# Altium PCB FUTSW.PcbDoc
Units mm, origin at the board's own origin, x right, y up, seen from the top; angles counter-clockwise.
Board outline 162 x 30 mm, 2 copper layers (Top Layer, Bottom Layer); 131 components, 84 nets, 390 pads, 90 vias.
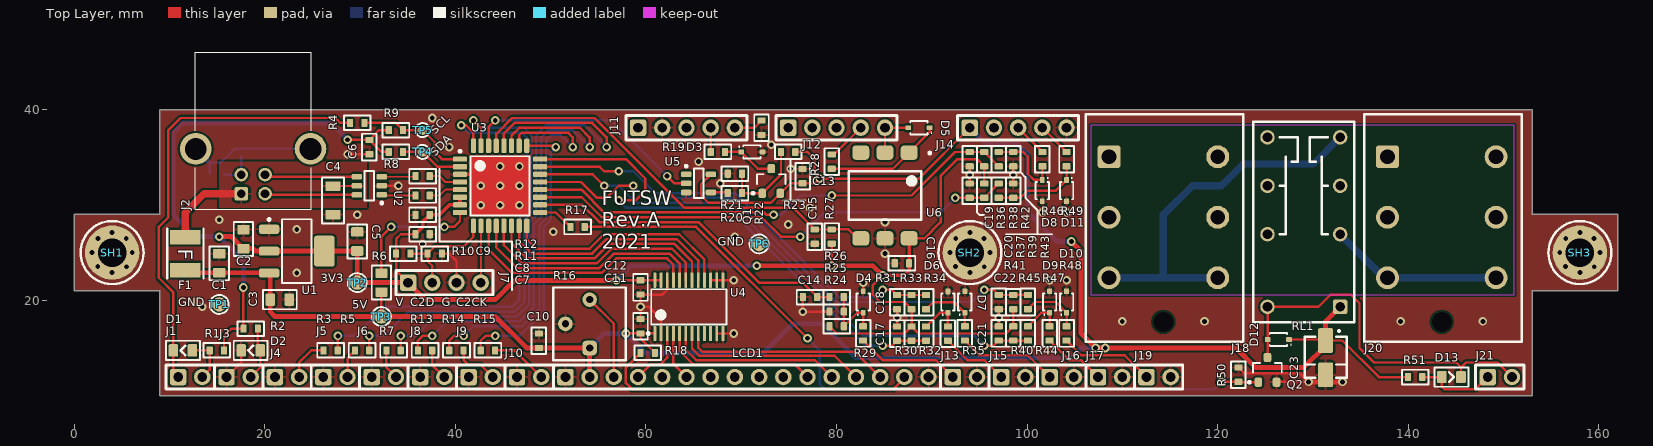
[diagram p0: Top Layer view]
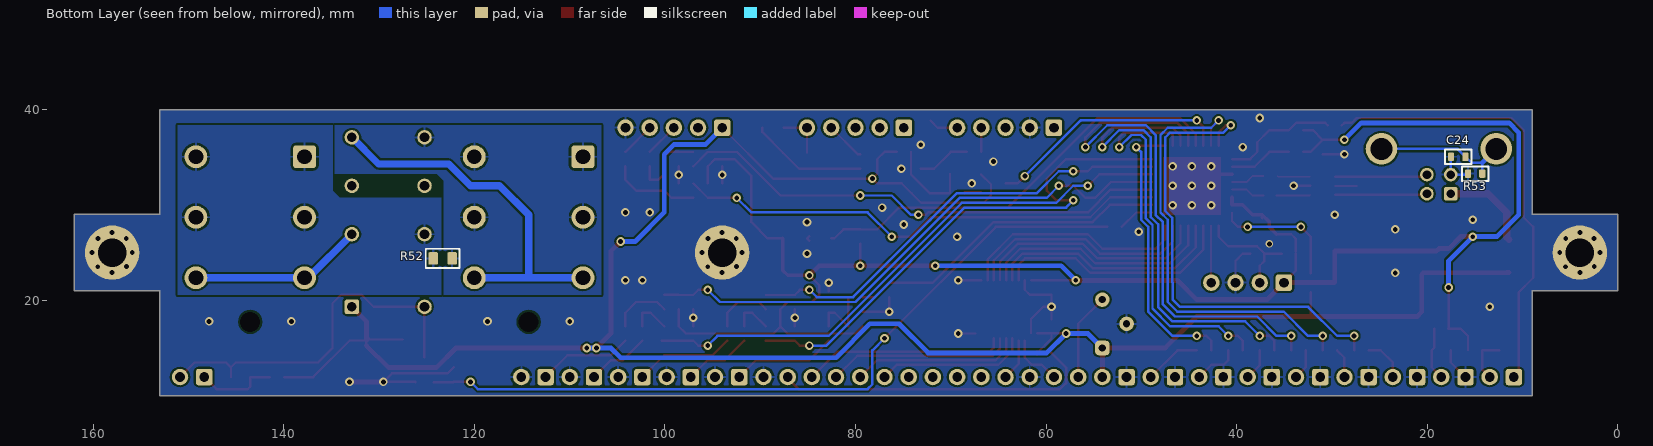
[diagram p1: Bottom Layer view, seen from below]
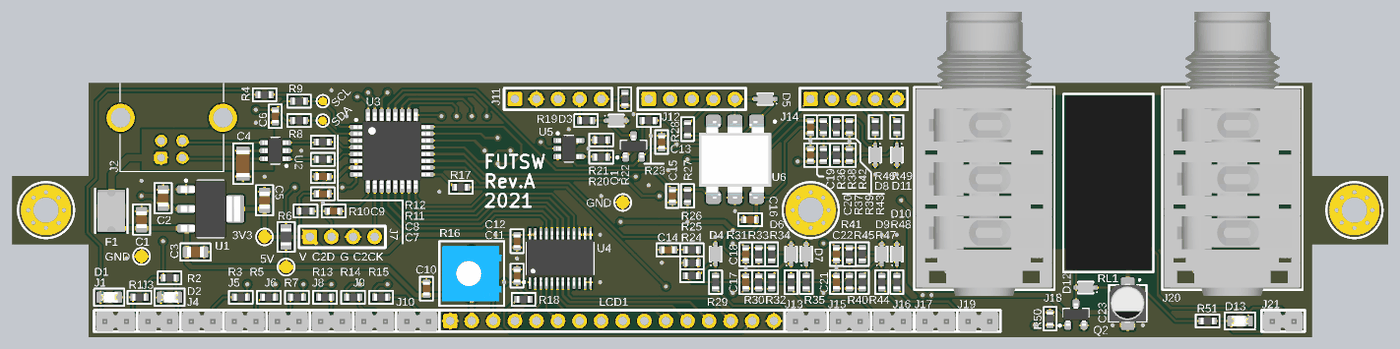
[diagram p2: 3D render of the assembled board from above, using the file's embedded part models]
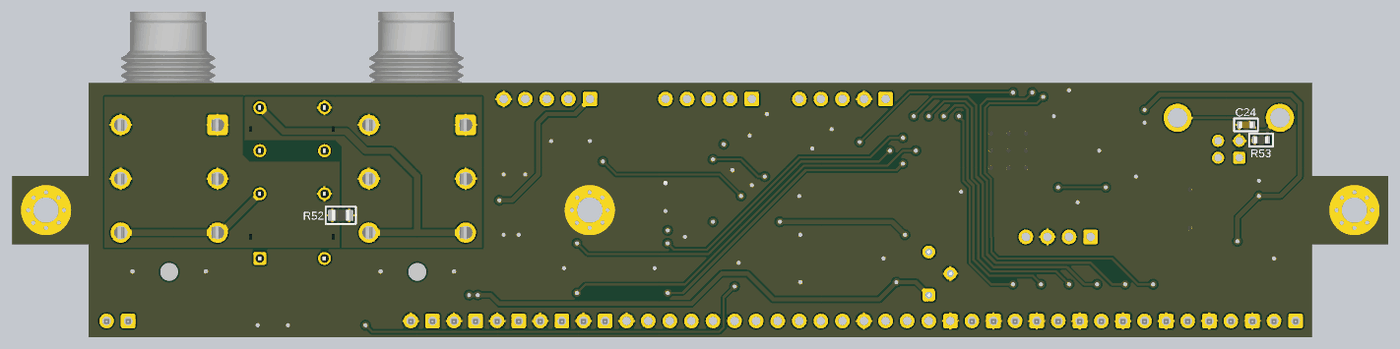
[diagram p3: 3D render of the assembled board from below, using the file's embedded part models]

## Layer stack, top to bottom
Top Solder: solder mask 0.0102, Solder Resist, Dk 3.5
Top Layer: signal copper 0.0356
Dielectric 1: dielectric 0.32, FR-4, Dk 4.8
Bottom Layer: signal copper 0.0356
Bottom Solder: solder mask 0.0102, Solder Resist, Dk 3.5

## Board outline
0,29 9,29 9,40 153,40 153,29 162,29 162,21 153,21 153,10 9,10 9,21 0,21

## Design rules (kind name [scope] priority, off if disabled: settings)
Clearance [All] p1: gap=0.203 ignorepadtopadclearanceinfootprint=FALSE
DiffPairsRouting [All] p1: maxlimit=0.254 minlimit=0.203 mostfreqgap=0.254 toplayer_minwidth=0.203 toplayer_maxwidth=0.254 toplayer_prefwidth=0.254 bottomlayer_minwidth=0.203 bottomlayer_maxwidth=0.254 bottomlayer_prefwidth=0.254 maxuncoupledlength=12.7
HoleSize [All] p1: absolutevalues=TRUE maxlimit=2.54 minlimit=0.3 maxpercent=80.000 minpercent=20.000
PolygonConnect PolygonConnectToComponentPrimitives [All vs IsComponentPrimitive and not HasFootprint('SH\D3.0\S5.7')] p1: connectstyle=Relief reliefconductorwidth=0.254 reliefentries=4 polygonreliefangle="90 Angle" airgapwidth=0.254
PolygonConnect [All] p2: connectstyle=Direct reliefconductorwidth=0.254 reliefentries=4 polygonreliefangle="90 Angle" airgapwidth=0.254
RoutingVias [All] p1: holewidth=0.3 width=0.8 viastyle="Through Hole" minholewidth=0.3 minwidth=0.6 maxholewidth=0.3 maxwidth=1.5 // PCBWay Capabilities
SolderMaskExpansion [All] p1: expansion=0.102
Width [All] p1: maxlimit=0.762 minlimit=0.203 preferedwidth=0.254
28 further rules are at their usual default settings.

## Classes and differential pairs
component class Inputs: C4 C7 C14 C21 C22 C23 C24 D4 D7 D8 D9 D10 D11 D12 D13 J5 J6 J7 J8 J9 J10 J13 J14 J15 J16 J17 J18 J19 J21 Q2 R3 R5 R7 R9 R10 R11 R13 R14 R15 R17 R21 R26 R30 R31 R33 R36 R38 R39 R40 R41 R43 R44 R46 R47 R48 R49 R50 R52 R53 RL1
component class LCD: C3 C11 C22 LCD1 R30 R53 U4
component class MCU: C3 C4 C5 C6 C7 C14 C17 C18 C19 C20 C21 C23 C24 D12 D13 F1 J7 J13 J14 J16 J20 J21 R2 R10 R11 R17 R21 R30 R31 R39 R42 R43 R46 R49 R51 R53 SH1 SH2 SH3 TP1 TP2 TP3 TP4 TP5 TP6 U1 U2 U3
component class MIDI: C16 C21 C23 D4 D11 J5 J14 Q2 R34 R38 R44 R46 R47 R52 R53 U5
differential pair USBD: +USBD_P -USBD_N
differential pair USBUP1: +USBUP1_P -USBUP1_N
differential pair USBUP2: +USBUP2_P -USBUP2_N

## Components (designator, comment, footprint, x,y, rotation, side; value= is the part's Value field where it differs from the comment)
C1 "100nF" 0805C_RF_M 15.24,23.876 r270 top (schematic designator C13)
C2 "100nF" 0805C_RF_M 17.78,26.416 r270 top (schematic designator C15)
C3 "1nF" 0805C_RF_M 21.59,20.066 r180 top (schematic designator C12)
C4 "100nF" 1206C_RF_M 27.178,30.48 r270 top (schematic designator C5)
C5 "1nF" 0805C_RF_M 29.718,26.162 r270 top (schematic designator C14)
C6 "100nF" 0603C_RF_M 30.988,36.068 r90 top (schematic designator C4)
C7 "100nF" 0603C_RF_M 36.576,26.924 r180 top (schematic designator C19)
C8 "1uF" 0603C_RF_M 36.576,28.956 r0 top (schematic designator C18)
C9 "100nF" 0603C_RF_M 37.846,24.892 r180 top (schematic designator C20)
C10 "100nF" 0603C_RF_M 48.768,15.748 r270 top (schematic designator C28)
C11 "100nF" 0603C_RF_M 59.436,17.272 r270 top (schematic designator C29)
C12 "100nF" 0603C_RF_M 59.436,21.336 r90 top (schematic designator C30)
C13 "100nF" 0603C_RF_M 76.454,33.02 r270 top (schematic designator C25)
C14 "100nF" 0603C_RF_M 77.228,20.32 r0 top (schematic designator C8)
C15 "100nF" 0603C_RF_M 77.724,26.67 r270 top (schematic designator C27)
C16 "100nF" 0603C_RF_M 86.868,23.876 r0 top (schematic designator C26)
C17 "100nF" 0603C_RF_M 86.36,16.498 r270 top (schematic designator C6)
C18 "100nF" 0603C_RF_M 86.36,19.8 r90 top (schematic designator C7)
C19 "100nF" 0603C_RF_M 93.98,31.496 r90 top (schematic designator C3)
C20 "100nF" 0603C_RF_M 93.98,34.798 r90 top (schematic designator C1)
C21 "100nF" 0603C_RF_M 97.028,16.51 r270 top (schematic designator C9)
C22 "100nF" 0603C_RF_M 97.028,19.812 r90 top (schematic designator C10)
C23 "4.7 uF" C_EL_B_4MM_RF_M 131.318,13.97 r270 top (schematic designator C2)
C24 "1nF" 0603C_RF_M 16.764,35.052 r180 bottom (schematic designator C17)
D1 "LED" 0805LED_RF_M 11.43,14.732 r0 top (schematic designator D17)
D2 "LED" 0805LED_RF_M 18.542,14.732 r0 top (schematic designator D16)
D3 "TVS" NXP_SOD-323_RF_M 71.12,35.56 r0 top (schematic designator D19)
D4 "TVS" NXP_SOD-323_RF_M 82.804,19.812 r90 top (schematic designator D7)
D5 "D" NXP_SOD-323_RF_M 88.646,38.1 r180 top (schematic designator D18)
D6 "TVS" NXP_SOD-323_RF_M 91.694,19.8 r90 top (schematic designator D5)
D7 "TVS" NXP_SOD-323_RF_M 93.472,19.812 r90 top (schematic designator D6)
D8 "TVS" NXP_SOD-323_RF_M 101.6,31.496 r270 top (schematic designator D4)
D9 "TVS" NXP_SOD-323_RF_M 102.362,19.812 r90 top (schematic designator D8)
D10 "TVS" NXP_SOD-323_RF_M 104.14,19.812 r90 top (schematic designator D9)
D11 "TVS" NXP_SOD-323_RF_M 104.14,31.496 r270 top (schematic designator D3)
D12 "D" NXP_SOD-323_RF_M 126.365,15.875 r180 top (schematic designator D1)
D13 "LED" 0805LED_RF_M 144.526,11.938 r180 top (schematic designator D2)
F1 "250 mA" BOURNS_MF-MSMF110/16-2_RF_H 11.684,24.892 r270 top
J1 "LED" HEADER-2.54-2P1 10.922,11.938 r0 top (schematic designator J17)
J2 "USB" UJ2-BH-2-TH 18.796,33.528 r180 top (schematic designator J18)
J3 "PINHDR_2x1" HEADER-2.54-2P1 16.002,11.938 r0 top (schematic designator J19)
J4 "LED1" HEADER-2.54-2P1 21.082,11.938 r0 top (schematic designator J11)
J5 "LED2" HEADER-2.54-2P1 26.162,11.938 r0 top (schematic designator J12)
J6 "LED3" HEADER-2.54-2P1 31.242,11.938 r0 top (schematic designator J13)
J7 "DEBUG" HEADER-2.54-4P1 35.052,21.844 r0 top (schematic designator J20)
J8 "LED4" HEADER-2.54-2P1 36.322,11.938 r0 top (schematic designator J14)
J9 "LED5" HEADER-2.54-2P1 41.402,11.938 r0 top (schematic designator J15)
J10 "LED6" HEADER-2.54-2P1 46.482,11.938 r0 top (schematic designator J16)
J11 "PINHDR-5P1" HEADER-2.54-5P1 59.182,38.1 r0 top (schematic designator J26)
J12 "PINHDR-5P1" HEADER-2.54-5P1 74.93,38.1 r0 top (schematic designator J27)
J13 "Pedal" HEADER-2.54-2P1 92.202,11.938 r0 top (schematic designator J8)
J14 "PINHDR_5x1" HEADER-2.54-5P1 93.98,38.1 r0 top (schematic designator J2)
J15 "Switch" HEADER-2.54-2P1 97.282,11.938 r0 top (schematic designator J6)
J16 "Switch" HEADER-2.54-2P1 102.362,11.938 r0 top (schematic designator J7)
J17 "Switch" HEADER-2.54-2P1 107.442,11.938 r0 top (schematic designator J9)
J18 "ACJS-HHDR" ACJS-HHDR 114.3,28.702 r270 top (schematic designator J4)
J19 "Switch" HEADER-2.54-2P1 112.522,11.938 r0 top (schematic designator J10)
J20 "ACJS-HHDR" ACJS-HHDR 143.51,28.702 r270 top (schematic designator J1)
J21 "LED" HEADER-2.54-2P1 148.336,11.938 r0 top (schematic designator J3)
LCD1 "WH1602N" PINHDR-16P1-2.54 51.562,11.938 r0 top
Q1 "PNP" SOT-23-3 73.152,32.512 r90 top (schematic designator Q2)
Q2 "IRLML2502" IRLML_SOT-23 125.222,12.7 r90 top (schematic designator Q1)
R1 "470R" 0603R_RF_M 14.986,14.732 r0 top (schematic designator R16)
R2 "560R" 0603R_RF_M 18.542,17.018 r180 top (schematic designator R42)
R3 "470R" 0603R_RF_M 26.924,14.732 r0 top (schematic designator R36)
R4 "0R" 0603R_RF_M 29.718,38.608 r180 top (schematic designator R31)
R5 "470R" 0603R_RF_M 30.226,14.732 r0 top (schematic designator R37)
R6 "1K" 0805R_RF_M 32.258,21.844 r270 top (schematic designator R28)
R7 "470R" 0603R_RF_M 33.528,14.732 r0 top (schematic designator R38)
R8 "10K" 0603R_RF_M 33.782,35.56 r180 top (schematic designator R30)
R9 "10K" 0603R_RF_M 33.782,37.846 r180 top (schematic designator R29)
R10 "10K" 0603R_RF_M 34.544,24.892 r0 top (schematic designator R51)
R11 "22R" 0603R_RF_M 36.576,30.988 r180 top (schematic designator R43)
R12 "22R" 0603R_RF_M 36.576,33.02 r180 top (schematic designator R44)
R13 "470R" 0603R_RF_M 36.83,14.732 r180 top (schematic designator R39)
R14 "470R" 0603R_RF_M 40.132,14.732 r180 top (schematic designator R40)
R15 "470R" 0603R_RF_M 43.434,14.732 r180 top (schematic designator R41)
R16 "20K" BOURNS_3362P 54.102,17.526 r90 top (schematic designator R60)
R17 "330R" 0603R_RF_M 52.832,27.686 r0 top (schematic designator R12)
R18 "0R" 0603R_RF_M 60.198,14.478 r180 top (schematic designator R62)
R19 "220R" 0603R_RF_M 67.564,35.56 r180 top (schematic designator R57)
R20 "1K" 0603R_RF_M 69.342,31.242 r180 top (schematic designator R54)
R21 "10K" 0603R_RF_M 69.342,33.274 r180 top (schematic designator R17)
R22 "220R" 0603R_RF_M 72.136,38.1 r90 top (schematic designator R59)
R23 "10K" 0603R_RF_M 74.93,35.56 r0 top (schematic designator R18)
R24 "10K" 0603R_RF_M 80.022,17.272 r180 top (schematic designator R20)
R25 "10K" 0603R_RF_M 80.022,18.796 r0 top (schematic designator R27)
R26 "1K" 0603R_RF_M 80.022,20.32 r180 top
R27 "10K" 0603R_RF_M 79.502,26.682 r90 top (schematic designator R58)
R28 "220R" 0603R_RF_M 79.502,34.544 r270 top (schematic designator R55)
R29 "1K" 0603R_RF_M 82.804,16.51 r90 top (schematic designator R25)
R30 "5K1" 0603R_RF_M 87.884,16.498 r270 top (schematic designator R5)
R31 "5K1" 0603R_RF_M 87.884,19.8 r90 top (schematic designator R10)
R32 "1K" 0603R_RF_M 89.408,16.498 r270 top (schematic designator R22)
R33 "1K" 0603R_RF_M 89.408,19.8 r90 top (schematic designator R24)
R34 "1K" 0603R_RF_M 91.694,16.498 r90 top (schematic designator R21)
R35 "1K" 0603R_RF_M 93.472,16.51 r90 top (schematic designator R23)
R36 "10K" 0603R_RF_M 95.504,31.496 r90 top (schematic designator R4)
R37 "10K" 0603R_RF_M 95.504,34.798 r270 top (schematic designator R1)
R38 "1K" 0603R_RF_M 97.028,31.496 r90 top (schematic designator R9)
R39 "1K" 0603R_RF_M 97.028,34.798 r270 top (schematic designator R7)
R40 "5K1" 0603R_RF_M 98.552,16.51 r270 top (schematic designator R13)
R41 "5K1" 0603R_RF_M 98.552,19.8 r90 top (schematic designator R15)
R42 "2K" 0603R_RF_M 98.552,31.496 r90 top (schematic designator R11)
R43 "2K" 0603R_RF_M 98.552,34.798 r90 top (schematic designator R3)
R44 "1K" 0603R_RF_M 100.076,16.51 r270 top (schematic designator R33)
R45 "1K" 0603R_RF_M 100.076,19.812 r90 top (schematic designator R35)
R46 "1K" 0603R_RF_M 101.6,34.798 r270 top (schematic designator R6)
R47 "1K" 0603R_RF_M 102.362,16.51 r90 top (schematic designator R32)
R48 "1K" 0603R_RF_M 104.14,16.51 r90 top (schematic designator R34)
R49 "1K" 0603R_RF_M 104.14,34.798 r270 top (schematic designator R8)
R50 "33K" 0603R_RF_M 122.174,12.192 r90 top (schematic designator R14)
R51 "1K" 0603R_RF_M 140.716,11.938 r180 top (schematic designator R2)
R52 "0R" 0805R_RF_M 123.317,24.384 r0 bottom (schematic designator R19)
R53 "1M" 0603R_RF_M 14.986,33.274 r180 bottom (schematic designator R45)
RL1 "G5V-2-H1" G5V-2-H1 129.032,28.194 r90 top
SH1 "SH-30/57" SH\D3.0\S5.7 4,25 r0 top locked
SH2 "SH-30/57" SH\D3.0\S5.7 94,25 r0 top locked (schematic designator SH3)
SH3 "SH-30/57" SH\D3.0\S5.7 158,25 r0 top locked (schematic designator SH2)
TP1 "GND" PAD_R_1.5MM 15.24,19.558 r0 top (schematic designator TP3)
TP2 "3V3" PAD_R_1.5MM 29.718,21.844 r90 top (schematic designator TP5)
TP3 "5V" PAD_R_1.5MM 32.258,18.288 r90 top (schematic designator TP4)
TP4 "SDA" PAD_R_1MM 36.576,35.56 r90 top (schematic designator TP2)
TP5 "SCL" PAD_R_1MM 36.576,37.846 r0 top (schematic designator TP1)
TP6 "GND" PAD_R_1.5MM 71.882,25.908 r0 top
U1 "LM1117IMP-3.3" SOT-223 23.368,25.146 r0 top (schematic designator U2)
U2 "USBLC6-2SC6" TI_SOT-23-6 30.988,32.004 r180 top (schematic designator U1)
U3 "C8051F320" LQFP-32 44.704,32.004 r0 top
U4 "SN74LVC4245APWR" TI_TSSOP-24 64.516,19.304 r90 top (schematic designator U8)
U5 "SN74LVC1G17DBVR" TI_SOT-23-5 65.532,32.258 r0 top (schematic designator U6)
U6 "H11L1SR2M" H11L1SR2M_SMD-6 85.09,30.988 r180 top (schematic designator U7)

## Footprints (in the part's own frame and the unit in brackets; to place one, negate y for a bottom-side part, rotate by r counter-clockwise, add the part's x,y. Pads: shape width x height; smd on the part's side, far side on the other; paste and mask are expansions set on the pad)
0603C_RF_M [mm] "Chip Capacitor 0603 Reflow Medium"
  rrect25% 0.65x0.85 smd: 1(-0.75,0) 2(0.75,0)
  silkscreen extent -1.4,-0.76 1.4,0.76, body extent -0.8,-0.4 0.8,0.41, height 0.9
0603R_RF_M [mm] "Chip Resistor 0603 Reflow Medium"
  rrect25% 0.65x0.85 smd: 1(-0.75,0) 2(0.75,0)
  silkscreen extent -1.4,-0.76 1.4,0.76, body extent -0.8,-0.4 0.8,0.4, height 0.55
0805C_RF_M [mm] "Chip Capacitor 0805 Reflow Medium"
  rrect25% 1x1.3 smd: 1(-1,0) 2(1,0)
  silkscreen extent -1.78,-1.02 1.78,1.02, body extent -1,-0.62 1.01,0.63, height 0.94
0805LED_RF_M [mm] "Chip LED 0805 Reflow Medium"
  rrect25% 1x1.3 smd: A(1,0) C(-1,0)
  silkscreen extent -1.78,-1.02 1.78,1.02, body extent -1,-0.62 1,0.63, height 0.7
0805R_RF_M [mm] "Chip Resistor 0805 Reflow Medium"
  rrect25% 1x1.3 smd: 1(-1,0) 2(1,0)
  silkscreen extent -1.78,-1.02 1.78,1.02, body extent -1,-0.62 1,0.63, height 0.6
1206C_RF_M [mm] "Chip Capacitor 1206 Reflow Medium"
  rrect25% 1x1.6 smd: 1(-1.5,0) 2(1.5,0)
  silkscreen extent -2.41,-1.14 2.41,1.14, body extent -1.6,-0.8 1.6,0.8, height 0.94
ACJS-HHDR [mm] "1/4\" Stereo Jack PCB Receptacle"
  rrect25% 2.4x2.4 hole 1.55: 1(-6.35,-5.7)
  round 2.4 hole 1.55: 2(0,-5.7) 3(6.35,-5.7) 4(-6.35,5.7) 5(0,5.7) 6(6.35,5.7)
  round 1.524 hole 2.1 unplated: ""(10.98,0)
  silkscreen extent -10.8,-8.13 13.08,8.38, body extent -19.67,-7.87 13.83,8.13, height 12.8
BOURNS_3362P [mil] "Potentiometer Top Adjust"
  rrect50% 60x60 hole 30: 1(-100,0)
  round 60 hole 30: 2(0,100) 3(100,0)
  silkscreen extent -150,-150 150,150, body extent -130,-138 130,138, height 192
BOURNS_MF-MSMF110/16-2_RF_H [mil] "PTC RESET FUSE SMD 1812"
  rect 60x126 smd: 1(-68,0) 2(68,0)
  silkscreen extent -103,-75 102,75, body extent -88,-64 92,64, height 26
C_EL_B_4MM_RF_M [mm] "Electrolytic Capacitor SMD Size B 4mm OD"
  rrect25% 2.6x1.6 smd: N(1.8,0) P(-1.8,0)
  silkscreen extent -2.88,-2.2 2.1,2.2, body extent -2.35,-2.17 2.25,2.13, height 3.91
G5V-2-H1 [mil] "OMRON Low Signal Relay DPDT [ Compatible with HJR1-2C ]"
  rrect30% 60x60 hole 40: 1(-350,-150)
  round 60 hole 40: 4(-50,-150) 6(150,-150) 8(350,-150) 9(350,150) 11(150,150) 13(-50,150) 16(-350,150)
  silkscreen extent -413,-209 414,208, body extent -403,-200 404,198, height 433
H11L1SR2M_SMD-6 [mm] "SMD-6 OPTOISO"
  rrect50% 1.78x1.52 smd: 1(-2.54,-4.505) 2(0,-4.505) 3(2.54,-4.505) 4(2.54,4.505) 5(0,4.505) 6(-2.54,4.505)
  silkscreen extent -4.82,-4.57 3.81,2.54, body extent -4.25,-4.52 4.26,4.64, height 5.06
HEADER-2.54-2P1 [mil] "Pin Header Single Row 2 Positions Pitch 2.54 mm"
  rrect30% 68x68 hole 40: 1(0,0)
  round 68 hole 40: 2(100,0)
  silkscreen extent -50,-50 150,50, body extent -42,-50 142,45, height 331
HEADER-2.54-4P1 [mil] "Pin Header Single Row 4 Positions Pitch 2.54 mm"
  rrect30% 68x68 hole 40: 1(0,0)
  round 68 hole 40: 2(100,0) 3(200,0) 4(300,0)
  silkscreen extent -50,-50 350,50
HEADER-2.54-5P1 [mil] "Pin Header Single Row 5 Positions Pitch 2.54 mm"
  rrect30% 68x68 hole 40: 1(0,0)
  round 68 hole 40: 2(100,0) 3(200,0) 4(300,0) 5(400,0)
  silkscreen extent -50,-50 450,50
IRLML_SOT-23 [mm] "Infineon's IRLML Series Logic-Level Transistor SOT-23"
  rrect50% 0.97x0.8 smd: 1(-1.3,0.95) 2(-1.3,-0.95) 3(1.3,0)
  silkscreen extent -1.42,-1.5 0.7,2.02, body extent -1.32,-1.52 1.32,1.52, height 1.12
LQFP-32 [mm]
  rrect50% 1.5x0.55 smd: 1(-4.2,2.8) 2(-4.2,2) 3(-4.2,1.2) 4(-4.2,0.4) 5(-4.2,-0.4) 6(-4.2,-1.2) 7(-4.2,-2) 8(-4.2,-2.8) 17(4.2,-2.8) 18(4.2,-2) 19(4.2,-1.2) 20(4.2,-0.4) 21(4.2,0.4) 22(4.2,1.2) 23(4.2,2) 24(4.2,2.8)
  rrect50% 0.55x1.5 smd: 9(-2.8,-4.2) 10(-2,-4.2) 11(-1.2,-4.2) 12(-0.4,-4.2) 13(0.4,-4.2) 14(1.2,-4.2) 15(2,-4.2) 16(2.8,-4.2) 25(2.8,4.2) 26(2,4.2) 27(1.2,4.2) 28(0.4,4.2) 29(-0.4,4.2) 30(-1.2,4.2) 31(-2,4.2) 32(-2.8,4.2)
  silkscreen extent -4.32,-3.1 3.1,3.75, body extent -4.5,-4.5 4.5,4.5, height 1.2
NXP_SOD-323_RF_M [mm] "SOD-232 NXP PESD5V0S1BA Reflow"
  rrect25% 0.6x0.5 smd: A(1.125,0) C(-1.125,0)
  silkscreen extent -1.37,-0.7 0.9,0.7, body extent -1.27,-0.65 1.27,0.65, height 0.99
PAD_R_1.5MM [mm] "Pad Rounded 1.5mm"
  round 1.5 smd paste-10: 1(0,0)
  silkscreen extent -0.99,-0.99 0.99,0.99
PAD_R_1MM [mm] "Pad Rounded 1mm"
  round 1 smd paste-10: 1(0,0)
  silkscreen extent -0.74,-0.74 0.74,0.73
PINHDR-16P1-2.54 [mil] "Pin Header Single Row 16 Positions Pitch 2.54 mm"
  rrect30% 68x68 hole 40: 1(0,0)
  round 68 hole 40: 2(100,0) 3(200,0) 4(300,0) 5(400,0) 6(500,0) 7(600,0) 8(700,0) 9(800,0) 10(900,0) 11(1000,0) 12(1100,0) 13(1200,0) 14(1300,0) 15(1400,0) 16(1500,0)
  silkscreen extent -50,-50 1550,50
SH\D3.0\S5.7 [mm] "Screw Hole D3.0/5.7 T/B"
  round 0.7 hole 0.5: 1(-2.1,0) 1(-1.499,-1.473) 1(-1.473,1.473) 1(0,-2.1) 1(0,2.1) 1(1.473,1.473) 1(1.499,-1.499) 1(2.1,0)
  round 5.7 hole 3: 1(0,0)
  silkscreen extent -3.3,-3.3 3.3,3.3
SOT-23-3 [mm]
  rrect50% 0.97x0.8 smd: 1(-1.3,0.95) 2(-1.3,-0.95) 3(1.3,0)
  silkscreen extent -1.42,-1.5 0.7,2.02, body extent -1.32,-1.52 1.32,1.52, height 1.12
SOT-223 [mm] "SOT-223: 4 Leads; Tab Not Connected"
  rrect50% 2.15x0.95 smd: 1(-2.9,2.3) 2(-2.9,0) 3(-2.9,-2.3)
  rrect25% 2.15x3.25 smd: 4(2.9,0)
  silkscreen extent -3.02,-3.35 1.55,3.45, body extent -3.5,-3.35 3.5,3.35, height 1.8
TI_SOT-23-5 [mm]
  rrect50% 1.1x0.6 smd: 1(-1.3,0.95) 2(-1.3,0) 3(-1.3,-0.95) 4(1.3,-0.95) 5(1.3,0.95)
  silkscreen extent -1.42,-1.55 0.5,1.92, body extent -1.5,-1.53 1.5,1.53, height 1.45
TI_SOT-23-6 [mm]
  rrect50% 1.1x0.6 smd: 1(-1.3,0.95) 2(-1.3,0) 3(-1.3,-0.95) 4(1.3,-0.95) 5(1.3,0) 6(1.3,0.95)
  silkscreen extent -1.43,-1.55 0.5,1.92, body extent -1.5,-1.52 1.5,1.53, height 1.45
TI_TSSOP-24 [mm]
  rrect50% 1.6x0.3 smd: 1(-2.8,3.575) 2(-2.8,2.925) 3(-2.8,2.275) 4(-2.8,1.625) 5(-2.8,0.975) 6(-2.8,0.325) 7(-2.8,-0.325) 8(-2.8,-0.975) 9(-2.8,-1.625) 10(-2.8,-2.275) 11(-2.8,-2.925) 12(-2.8,-3.575) 13(2.8,-3.575) 14(2.8,-2.925) 15(2.8,-2.275) 16(2.8,-1.625) 17(2.8,-0.975) 18(2.8,-0.325) 19(2.8,0.325) 20(2.8,0.975) 21(2.8,1.625) 22(2.8,2.275) 23(2.8,2.925) 24(2.8,3.575)
  silkscreen extent -2.92,-3.95 1.85,4.4, body extent -3.2,-3.95 3.2,3.95, height 1.2
UJ2-BH-2-TH [mm] "USB 2.0 Type B Receptacle (CUI UJ2-BH-2-TH)"
  rrect30% 1.428x1.428 hole 0.92: 1(1.25,2.355)
  round 1.428 hole 0.92: 2(-1.25,2.355) 3(-1.25,0.355) 4(1.25,0.355)
  round 3.316 hole 2.3: SH(-6.02,-2.355) SH(6.02,-2.355)
  silkscreen extent -6.1,-12.51 6.1,3.99, body extent -7.52,-12.47 7.48,3.98, height 11.1

## Part data
C1 C2 C3 C4 C5 C6 C7 C8 C9 C10 C11 C12 C13 C14 C15 C16 C17 C18 C19 C20 C21 C22 C24: library part C, "Capacitor", Manufacturer="Generic Brand", Max Voltage="? V", Tolerance=?, Category=Capacitor, Mounting Technology=SMT, Supplier Link=http://
C23: library part C-P, "Polarized Capacitor", Manufacturer="Generic Brand", Max Voltage="? V", Tolerance=?, Category=Capacitor, Mounting Technology=SMT, Supplier Link=http://
D1 D2 D13: Emitting Color=Unspecified, Forward Voltage Drop="? V", Manufacturer="Generic Brand", Category=Diode, Mounting Technology=SMT, Supplier Link=http://
D3 D4 D6 D7 D8 D9 D10 D11: library part D-TVS, "TVS Diode Bidirectional", Manufacturer="Generic Brand", Power Rating="? W", Category=Diode, Mounting Technology=SMT, Supplier Link=http://
D5 D12: "Diode (Rectifier)", Manufacturer="Generic Brand", Max Forward Voltage="? V", Power Rating="? W", Category=Diode, Mounting Technology=SMT, Supplier Link=http://
F1: library part PPTC, "Resettable Fuse", Manufacturer="Generic Brand", Max Voltage="? V", Category=Fuse, Hold Current="250 mA", Mounting Technology=SMT, Supplier Link=http://
J1 J4 J5 J6 J8 J9 J10 J15 J16 J17 J19 J21: library part PINHDR_2x1, "Generic Pin Header 2x1"
J2: library part USBB-1J, "USB Type B Receptacle", Case="USB Type B", Manufacturer=Connfly, Supplier Part No=249636968, Mounting Type=THT, Product Number="USBB-1J (DS1099-WN0)", Supplier=Chipdip, Supplier Link=https://www.chipdip.by/product/usbb-1j
J3: "Generic Pin Header 2x1"
J7: library part PINHDR_4x1, "Generic Pin Header 4x1"
J11 J12 J14: "Generic Pin Header 5x1"
J13: library part PINHDR-2P1, "Pin Header Single Row 2 Positions", Mounting Technology=THT
J18 J20: "1/4\" Stereo Jack PCB Receptacle", Alternative Supplier Part No=44079, Manufacturer=Amphenol, Manufacturer Product No=ACJM-HHDR, Alternative Supplier=Belchip, Alternative Supplier Link=https://belchip.by/product/?selected_product=44079, Mounting Technology=HMT
LCD1: "Dot Matrix Character LCD Module 16x2", Manufacturer=Winstar, Manufacturer Part No=WH1602B-YYH-CTK, Supplier Part No=9000032691, Mounting Technology=THT, Supplier=Chipdip, Supplier Link=https://www.chipdip.by/product/wh1602b-yyh-ctk
Q1: "Bipolar Transistor PNP", Manufacturer="Generic Brand", Power Rating="? W", Category=Transistor, IGS="? A", Mounting Technology=SMT, Supplier Link=http://, VDS="? V", VGS="? V"
Q2: "MOSFET N-CH 20V 4.2A SOT23", Alternative Supplier Part No=517112745, Manufacturer=Infineon, Manufacturer Part No=IRLML2502TRPBF, Package=SOT-23, Supplier Part No=IRLML2502TRPBFCT-ND, Alternative Supplier=Chipdip, Alternative Supplier Link=https://www.chipdip.by/product/irlml2502tr, Mounting Technology=SMT, Supplier=DigiKey, Supplier Link=https://www.digikey.com/en/products/detail/infineon-technologies/IRLML2502TRPBF/811439
R1 R2 R3 R4 R5 R6 R7 R8 R9 R10 R11 R12 R13 R14 R15 R17 R18 R19 R20 R21 R22 R23 R24 R25 R26 R27 R28 R29 R30 R31 R32 R33 R34 R35 R36 R37 R38 R39 R40 R41 R42 R43 R44 R45 R46 R47 R48 R49 R50 R51 R52 R53: library part R, "Resistor", Manufacturer="Generic Brand", Max Voltage="? V", Power Rating="? W", Tolerance=?, Category=Resistor, Mounting Technology=SMT, Supplier Link=http://
R16: library part POT, "Generic Potentiometer / Variable Resistor", Tolerance=1%, Mounting Type=THT, Supplier Link=http://
RL1: "RELAY GEN PURPOSE DPDT 1A 5VDC", Alternative Supplier Part No=32041, Manufacturer=Omron, Manufacturer Part No="G5V-2-H1 DC5", Supplier Part No=Z108-ND, Alternative Supplier=Belchip, Alternative Supplier Link=https://belchip.by/product/?selected_product=32041, Compatible Model="TIANBO HJR1-2C", Mounting Technology=THT, Supplier=DigiKey, Supplier Link=https://www.digikey.com/en/products/detail/omron-electronics-inc-emc-div/G5V-2-H1-DC5/277844
SH1 SH2 SH3: "Screw Hole D3.0/5.7 T/B"
TP1 TP2 TP3 TP4 TP5 TP6: library part TP, "Test Point / Pad"
U1: library part LM1117, "Voltage Regulator Linear 1% 800mA SOT-223", Case=SOT-223, Manufacturer="Texas Instruments", Supplier Part No=5641124530, Mounting Type=SMT, Product Number=LM1117IMP-3.3, Supplier=Chipdip, Supplier Link=https://www.chipdip.by/product/lm1117imp-3.3-nopb-2, VIN_MAX=+15V, VOUT=+3.3V
U2: "Low Capacitance USB ESD Protection", Case=SOT-23-6, Manufacturer=STMicroelectronics, Supplier Part No=9000039051, Mounting Type=SMT, Product Name=USBLC6-2SC6, Supplier=Chipdip, Supplier Link=https://www.chipdip.by/product/usblc6-2sc6
U3: "IC MCU 8BIT 16KB FLASH 32LQFP", Alternative Supplier Part No=1108753860, Manufacturer="Silicon Labs", Manufacturer Part No=C8051F320-GQR, Package=LQFP-32, Supplier Part No=C8051F320-GQRCT-ND, Alternative Supplier=Chipdip, Alternative Supplier Link=https://www.chipdip.by/product/c8051f320-gqr, Mounting Technology=SMT, Supplier=DigiKey, Supplier Link=https://www.digikey.com/en/products/detail/silicon-labs/C8051F320-GQR/990799
U4: "Octal Bus Transceiver And 3.3-V To 5-V Shifter With 3-State Outputs", Manufacturer="Texas Instruments", Supplier Part No=9000247069, Manufacturer Part No=SN74LVC4245APWR, Supplier=Chipdip, Supplier Link=https://www.chipdip.by/product/sn74lvc4245apwr
U5: "IC BUF NON-INVERT 5.5V SOT23-5", Manufacturer="Texas Instruments", Operating Temperature="-40°C ~ 125°C (TA)", Package=SOT-23-5, Supplier Part No=296-11933-1-ND, Manufacturer Product Number=SN74LVC1G17DBVR, Mounting Type=SMT, Supplier Packaging="Cut Tape", Supplier Unit Price=$0.29, Supplier URL=https://www.digikey.com/en/products/detail/texas-instruments/SN74LVC1G17DBVR/389051
U6: "OPTOISO 4.17KV OPN COLL SMD-6", Alternative Supplier Part No=753715628, Manufacturer="ON Semiconductor", Package=SMD-6, Supplier Part No=H11L1SR2MCT-ND, Alternative Supplier=Chipdip, Alternative Supplier Link=https://www.chipdip.by/product/h11l1sr2m, Manufacturer Part No=H11L1SR2M, Mounting Type=SMT, Supplier=DigiKey, Supplier URL=https://www.digikey.com/en/products/detail/on-semiconductor/H11L1SR2M/458856

## Via types
v1: diameter 0.9, hole 0.5, Top Layer to Bottom Layer, tented both sides, 89 vias
v2: diameter 0.8, hole 0.5, Top Layer to Bottom Layer, tented both sides, 1 vias

## Nets (pads, with @x,y where several pads share a name; then routed paths per layer and width w, separated by ;. In a path a pad name is that pad's centre, name@x,y a point inside that pad or via, vN(x,y) a via of type N, cw(c..) or ccw(c..) an arc to the next point about the centre after c; other vN are vias at no path point)
3V3: C2.2 C5.2 C6.2 C7.2 C8.2 C12.2 C16.2 J7.1 R1.2 R2.2 R8.2 R9.2 R10.1 R24.2 R27.1 R30.1 R31.1 R36.2 R37.2 R40.1 R41.1 TP2.1 U1.2 U1.4 U3.6 U3.7 U4.23 U4.24 U6.6 | length 207.3
  Top Layer w0.254: R1.2 15.736,16.244 16.51,17.018 R2.2 17.78,17.03 v1(17.78,21.336) ; v1(28.702,36.83) 30.976,36.83 C6.2 ; R8.2 32.246,35.56 C6.2 ; R9.2 32.016,37.846 C6.2 ; R10.1 33.794,23.102 J7.1 ; R10.1@33.794,25.146 33.794,26.428 34.29,26.924 C7.2 ; v1@56.884,22.086 C12.2 60.923,22.086 U4.24 U4.23 ; R24.2@79.272,17.248 R24.2 80.034,16.51 87.146,16.51 R30.1 ; v1(79.502,23.622) R27.1 ; v1(84.836,22.606) 83.82,21.59 83.82,20.574 84.582,19.812 87.122,19.812 R31.1 R30.1 ; C16.2@87.618,24.118 C16.2@87.63,24.13 ; U6.6@87.618,26.471 U6.6 89.221,26.483 90.932,28.194 90.932,33.02 92.71,34.798 94.754,34.798 R37.2 R36.2 ; R41.1 R40.1 97.802,16.51 88.622,16.51 R30.1
  Top Layer w0.381: C7.2 36.576,27.674 36.576,28.206 C8.2 ; C8.2@37.326,28.678 C8.2 ; U3.6 U3.7 39.402,30.004 38.354,28.956 C8.2 ; v1(84.836,22.606) 87.122,22.606 87.618,23.102 C16.2 87.618,24.118 U6.6@87.618,26.471
  Top Layer w0.457: C5.2@29.702,25.146 C5.2
  Top Layer w0.508: v1(15.24,26.67) 16.526,26.67 C2.2 18.78,25.416 19.05,25.146 U1.2 U1.4 C5.2@29.702,25.146 ; C5.2 TP2.1 J7.1 36.83,20.066 44.196,20.066 46.216,22.086 v1@56.884,22.086 ; v1(71.628,23.622) v1(79.502,23.622) 83.82,23.622 v1(84.836,22.606)
  Bottom Layer w0.508: v1(17.78,21.336) 17.78,24.13 v1(15.24,26.67) 12.7,26.67 10.414,28.956 10.414,37.592 11.43,38.608 26.924,38.608 v1(28.702,36.83) ; v1(56.896,22.098) 58.42,23.622 v1(71.628,23.622)
5V: C1.2 C3.2 C10.2 C11.2 C13.2 C23.P D12.C F1.2 J14.1 LCD1.2 Q1.2 R6.2 R16.1 R18.1 R23.2 R51.2 RL1.1 TP3.1 U1.3 U4.1 U5.5 | length 233.7
  Top Layer w0.254: TP3.1 R6.2 ; R16.1@54.09,14.998 R16.1 ; v1(57.912,16.51) 57.924,16.522 C11.2 ; R18.1@60.941,14.485 59.436,15.99 C11.2 ; U4.1 60.923,16.522 C11.2 ; U5.5 65.786,32.162 65.786,30.988 66.548,30.226 73.116,30.226 Q1.2 75.148,32.258 77.724,32.258 v1(78.232,32.766) ; R23.2 76.962,35.56 77.724,34.798 77.724,33.274 v1(78.232,32.766) ; J14.1 88.646,32.766 v1(78.232,32.766) ; D12.C C23.P@131.213,15.875 ; C23.P@131.086,16.002 C23.P@131.213,15.875 ; C23.P@131.318,15.24 C23.P ; R51.2 136.906,11.938 133.074,15.77 C23.P ; C23.P@131.213,15.875 C23.P
  Top Layer w0.508: F1.2@11.43,22.911 11.684,22.911 11.719,22.876 C1.2 20.438,22.876 U1.3 20.59,22.724 C3.2 20.59,18.78 21.082,18.288 TP3.1 44.196,18.288 47.486,14.998 C10.2 R16.1@54.09,14.998 ; LCD1.2 R16.1 ; R18.1@60.941,14.485 R18.1 ; v1(104.648,26.162) 105.664,25.146 105.664,16.51 v1(107.188,14.986) v1(108.204,14.986) 121.92,14.986 123.952,12.954 129.032,12.954 C23.P@131.318,15.24 ; C23.P 131.318,17.78 RL1.1
  Bottom Layer w0.508: R16.1 55.626,16.51 v1(57.912,16.51) 59.944,14.478 72.39,14.478 75.438,17.526 78.486,17.526 82.042,13.97 104.648,13.97 105.664,14.986 v1(107.188,14.986) v1(108.204,14.986) ; J14.1 95.758,36.322 99.06,36.322 100.076,35.306 100.076,29.21 103.124,26.162 v1(104.648,26.162)
AIN: C14.2 R26.2 U3.18 | length 34.4
  Top Layer w0.254: U3.18 53.308,30.004 55.118,28.194 65.532,28.194 71.882,21.844 76.454,21.844 C14.2 R26.2
BYPASS: R17.1 U3.17 | length 3.8
  Top Layer w0.254: U3.17 50.552,29.204 R17.1@52.076,27.68
C2CK: C9.2 J7.2 R10.2 U3.9 | length 11.8
  Top Layer w0.254: R10.2 C9.2 ; J7.2@37.846,21.844 37.592,22.098 37.592,23.622 37.096,24.118 C9.2 ; U3.9 41.904,26.664 40.894,25.654 37.858,25.654 C9.2
C2D: J7.4 U3.10 | length 6
  Top Layer w0.254: J7.4 42.704,21.876 U3.10
GND: C1.1 C2.1 C3.1 C4.2 C5.1 C6.1 C7.1 C8.1 C9.1 C10.1 C11.1 C12.1 C13.1 C14.1 C15.2 C16.1 C17.1 C18.1 C19.2 C20.1 C21.1 C22.1 C23.N C24.1 D2.C D3.A D4.A D6.A D7.A D8.A D9.A D10.A D11.A J2.4 J3.1 J4.1 J5.1 J6.1 J7.3 J8.1 J9.1 J10.1 J11.2 J13.2 J14.5 J15.2 J16.2 J17.2 J19.2 LCD1.1 LCD1.5 LCD1.16 Q2.2 R16.2 R21.2 R22.1 R25.1 R42.2 R43.1 R50.2 R53.1 SH1.1 SH2.1 SH3.1 TP1.1 TP6.1 U1.1 U2.2 U3.3 U4.2 U4.11 U4.12 U4.13 U4.14 U4.15 U4.22 U5.3 U6.5 | length 61.2
  Top Layer w0.254: J3.1 17.542,13.478 D2.C ; v1(28.702,35.306) 30.976,35.306 C6.1 ; U2.2 v1(34.036,32.004) ; C9.1 39.37,24.892 40.132,24.13 J7.3 ; 42.602,33.204 42.672,33.274 v1(42.672,34.036) ; C11.1 v1(59.436,19.304) ; U4.2 61.591,18.038 60.325,19.304 v1(59.436,19.304) ; U4.22 62.241,21.093 61.734,20.586 C12.1 v1(59.436,19.304) ; U4.15 U4.14 U4.13 68.097,22.098 v1(69.215,22.098) ; U4.11 U4.12 68.097,16.51 v1(69.215,16.51) ; C14.1 76.466,20.308 v1(76.466,18.796) R25.1 ; D4.A v1(82.804,21.844) ; U6.5@84.836,26.229 U6.5 U6.5@84.836,26.737 ; C17.1 v1(86.36,18.161) C18.1 ; C19.2 v1(93.98,33.147) C20.1 ; C21.1 v1(97.028,18.161) C22.1 ; R42.2 v1(98.552,33.147) R43.1 R43.1@98.552,34.06 ; R50.2@122.162,12.954 R50.2 122.797,12.319 128.651,12.319 v1(129.54,11.43) ; Q2.2 126.202,11.43 v1@129.286,11.43
  Top Layer w0.381: U3.3 42.602,33.204
  Top Layer w0.508: v1(129.54,11.43) v1(133.096,11.43)
  Bottom Layer w0.254: R53.1 15.837,33.173 J2.4 C24.1@17.546,35.052
  other v1: 109.982,17.78 118.618,17.78 139.192,17.78 147.828,17.78 13.462,19.304 102.362,22.098 104.14,22.098 23.368,22.86 85.09,24.892 69.342,26.67 50.292,27.178 23.368,27.432 74.93,27.94 85.09,28.194 15.24,28.448 29.718,28.956 101.6,29.21 104.14,29.21 77.216,29.718 42.672,29.972 44.704,29.972 46.736,29.972 42.672,32.004 44.704,32.004 46.736,32.004 67.818,32.258 75.184,33.782 44.704,34.036 46.736,34.036 65.532,34.544 39.37,36.068 73.152,36.322 37.592,39.116
  other v2: 36.576,25.908
LCD_DB4: U3.13 U4.19 | length 25
  Top Layer w0.254: U3.13 45.104,25.762 46.99,23.876 54.864,23.876 56.388,25.4 62.738,25.4 64.191,23.947 U4.19
LCD_DB5: U3.14 U4.18 | length 24.8
  Top Layer w0.254: U3.14 45.904,25.978 47.498,24.384 54.61,24.384 56.134,25.908 62.992,25.908 64.841,24.059 U4.18
LCD_DB6: U3.15 U4.17 | length 24.6
  Top Layer w0.254: U3.15 46.704,26.194 48.006,24.892 54.356,24.892 55.88,26.416 63.246,26.416 65.491,24.171 U4.17
LCD_DB7: U3.16 U4.16 | length 24.4
  Top Layer w0.254: U3.16 47.504,26.41 48.514,25.4 54.102,25.4 55.626,26.924 63.5,26.924 66.141,24.283 U4.16
LCD_E: U3.12 U4.20 | length 25.2
  Top Layer w0.254: U3.12 44.304,25.546 46.482,23.368 55.118,23.368 56.642,24.892 62.484,24.892 63.541,23.835 U4.20
LCD_RS: U3.11 U4.21 | length 25.4
  Top Layer w0.254: U3.11 43.504,25.33 45.974,22.86 55.372,22.86 56.896,24.384 62.23,24.384 62.891,23.723 U4.21
LED1: R3.2 U3.32 | length 49.8
  Top Layer w0.254: R3.2 v1@27.674,16.244 ; v1(40.64,38.354) 41.148,38.354 41.904,37.598 U3.32
  Top Layer w0.381: v1@27.674,16.244 v1(27.686,16.256)
  Bottom Layer w0.254: v1(27.686,16.256) 29.464,16.256 32.512,19.304 45.974,19.304 46.736,20.066 46.736,21.844 46.787,21.895 46.787,28.651 47.498,29.362 47.498,37.084 46.99,37.592 41.402,37.592 v1(40.64,38.354)
LED2: R5.2 U3.31 | length 46.8
  Top Layer w0.254: R5.2 v1@30.976,16.244 ; v1(41.91,38.862) 42.704,38.068 U3.31
  Top Layer w0.381: v1@30.976,16.244 v1(30.988,16.256)
  Bottom Layer w0.254: v1(30.988,16.256) 32.512,16.256 35.052,18.796 46.228,18.796 47.244,19.812 47.244,28.448 48.006,29.21 48.006,37.338 47.244,38.1 42.672,38.1 v1(41.91,38.862)
LED3: R7.2 U3.28 | length 57.4
  Top Layer w0.254: R7.2 v1@34.278,16.244 ; U3.28 45.104,37.484 46.228,38.608 54.356,38.608 55.88,37.084 v1(55.88,36.068)
  Top Layer w0.381: v1@34.278,16.244 v1(34.29,16.256)
  Bottom Layer w0.254: v1(34.29,16.256) 35.814,16.256 37.846,18.288 46.482,18.288 47.752,19.558 47.752,28.194 48.514,28.956 48.514,37.338 49.53,38.354 53.594,38.354 v1(55.88,36.068)
LED4: R13.2 U3.27 | length 49.9
  Top Layer w0.254: R13.2 36.08,15.76 36.576,16.256 v1(37.592,16.256) ; U3.27 45.904,37.268 46.736,38.1 53.086,38.1 54.102,37.084 v1(54.102,36.068)
  Bottom Layer w0.254: v1(37.592,16.256) 39.116,17.78 46.736,17.78 48.26,19.304 48.26,27.963 49.022,28.725 49.022,37.084 49.784,37.846 52.324,37.846 v1(54.102,36.068)
LED5: R14.2 U3.26 | length 41.5
  Top Layer w0.254: R14.2 39.382,15.76 39.878,16.256 v1(40.894,16.256) ; U3.26 46.704,37.306 46.99,37.592 51.816,37.592 52.324,37.084 v1(52.324,36.068)
  Bottom Layer w0.254: v1(40.894,16.256) 41.91,17.272 46.99,17.272 48.838,19.12 48.838,27.894 49.53,28.587 49.53,36.83 50.038,37.338 51.054,37.338 v1(52.324,36.068)
LED6: R15.2 U3.25 | length 29.8
  Top Layer w0.254: R15.2 42.684,15.76 43.18,16.256 v1(44.196,16.256) ; U3.25 50.41,36.204 v1(50.546,36.068)
  Bottom Layer w0.254: v1(44.196,16.256) 46.736,16.256 49.295,18.815 49.295,27.705 50.038,28.448 50.038,35.56 v1(50.546,36.068)
LED_STBY: D1.C J1.1 R4.2 | length 47.1
  Top Layer w0.254: J1.1 10.43,12.43 D1.C 10.43,20.812 8.89,22.352 8.89,27.686 9.906,28.702 9.906,37.846 11.176,39.116 27.432,39.116 27.94,38.608 28.714,38.608 R4.2@28.968,38.354
MIDI_RX: C15.1 R27.2 U3.29 U6.4 | length 45.4
  Top Layer w0.254: U3.29 44.304,37.446 45.974,39.116 54.61,39.116 64.008,29.718 75.426,29.718 C15.1 79.49,27.42 R27.2 81.28,27.432 82.229,26.483 U6.4
MIDI_TX: U3.30 U5.2 | length 25.7
  Top Layer w0.254: U3.30 43.504,38.17 v1(44.196,38.862) ; v1(62.23,33.02) 62.992,32.258 U5.2
  Bottom Layer w0.254: v1(44.196,38.862) 56.388,38.862 56.388,38.852 62.22,33.02 v1(62.23,33.02)
NetD1_A: D12.A D13.C J21.2 Q2.3 RL1.16 | length 39.3
  Top Layer w0.254: Q2.3 125.24,14.018 D12.A D12.A@125.24,16.002 ; D12.A@125.222,15.984 D12.A@125.24,16.002 ; D13.C 145.526,12.938 ; J21.2 149.352,13.462 146.05,13.462 145.526,12.938 ; D12.A@125.24,16.002 125.24,19.286 RL1.16 130.556,19.304 131.826,20.574 133.985,20.574 134.874,19.685 134.874,14.986 136.398,13.462 145.034,13.462 145.526,12.97 145.526,12.938
NetD2_A: D13.A J21.1 R51.1 | length 8.5
  Top Layer w0.254: R51.1 D13.A 143.526,10.906 143.764,10.668 147.066,10.668 J21.1
NetD3_C: D11.C R38.1 R42.1 R49.2 | length 9.3
  Top Layer w0.254: R38.1 R42.1 99.326,30.746 100.076,31.496 103.015,31.496 D11.C R49.2
NetD4_C: D8.C R39.1 R43.2 R46.2 | length 8.3
  Top Layer w0.254: R39.1 R43.2 ; R43.2@98.552,35.56 99.568,35.56 100.076,35.052 100.076,33.274 100.729,32.621 D8.C R46.2
NetD5_C: D6.C R32.1 R34.2 | length 4.3
  Top Layer w0.254: R32.1 90.835,18.675 D6.C R34.2
NetD6_C: D7.C R33.1 R35.2 | length 6.3
  Top Layer w0.254: R33.1 90.158,19.8 92.347,19.8 93.472,18.675 R35.2 R35.2@93.472,17.248
NetD7_C: D4.C R24.1 R25.2 R26.1 R29.2 | length 7.1
  Top Layer w0.254: R26.1 R25.2 R24.1 82.187,18.687 D4.C R29.2
NetD8_C: D9.C R44.1 R47.2 | length 4.3
  Top Layer w0.254: R44.1 101.503,18.687 D9.C R47.2
NetD9_C: D10.C R45.1 R48.2 | length 6.3
  Top Layer w0.254: R45.1 100.826,19.812 103.015,19.812 D10.C R48.2
NetD16_A: D2.A J3.2 R2.1 | length 5.6
  Top Layer w0.254: J3.2 19.542,12.938 D2.A 19.292,14.982 R2.1
NetD17_A: D1.A J1.2 R1.1 | length 4.9
  Top Layer w0.254: D1.A R1.1 14.236,12.712 J1.2
NetD18_A: D5.A J12.5 U6.2 | length 5
  Top Layer w0.254: U6.2 J12.5 D5.A
NetD18_C: D5.C R28.2 U6.1 | length 12.3
  Top Layer w0.254: R28.2 85.931,33.794 U6.1 89.771,37.634 D5.C
NetD19_C: D3.C Q1.3 R19.1 | length 5.6
  Top Layer w0.254: R19.1 D3.C 71.743,33.812 Q1.3
NetJ2_3: J14.3 R46.1 | length 3.6
  Top Layer w0.254: J14.3 101.6,35.56 R46.1
NetJ2_4: J14.4 R49.1 | length 3.6
  Top Layer w0.254: J14.4 104.14,35.56 R49.1
NetJ6_1: J15.1 R34.1 | length 7.2
  Top Layer w0.254: R34.1 93.726,13.716 95.504,13.716 J15.1
NetJ7_1: J16.1 R35.1 | length 10.5
  Top Layer w0.254: R35.1@93.472,15.748 94.996,14.224 100.076,14.224 J16.1
NetJ8_1: J13.1 R29.1 | length 11
  Top Layer w0.254: R29.1 84.848,13.716 90.424,13.716 J13.1
NetJ9_1: J17.1 R47.1 | length 6.7
  Top Layer w0.254: R47.1 104.406,13.716 105.664,13.716 J17.1
NetJ10_1: J19.1 R48.1 | length 10
  Top Layer w0.254: R48.1 105.676,14.224 110.236,14.224 J19.1
NetJ11_2: J4.2 R3.1 | length 4.6
  Top Layer w0.254: J4.2 23.622,13.462 24.892,14.732 R3.1
NetJ12_2: J5.2 R5.1 | length 3.1
  Top Layer w0.254: J5.2 28.702,13.958 R5.1
NetJ13_2: J6.2 R7.1 | length 3.2
  Top Layer w0.254: R7.1 32.778,12.942 J6.2
NetJ14_2: J8.2 R13.1 | length 3.3
  Top Layer w0.254: R13.1 37.58,13.22 J8.2
NetJ15_2: J9.2 R14.1 | length 4.8
  Top Layer w0.254: R14.1 40.882,13.728 41.402,13.208 42.672,13.208 J9.2
NetJ16_2: J10.2 R15.1 | length 6
  Top Layer w0.254: R15.1 46.228,14.732 J10.2
NetJ26_4: J11.4 R19.2 | length 2.5
  Top Layer w0.254: J11.4 66.814,38.088 R19.2
NetJ26_5: J11.5 R22.2 | length 3.1
  Top Layer w0.254: J11.5 71.386,38.1 R22.2
NetJ27_4: J12.4 R28.1 | length 4.2
  Top Layer w0.254: R28.1 79.744,35.294 J12.4
NetLCD1_3: LCD1.3 R16.3 | length 9.2
  Top Layer w0.254: R16.3 56.642,17.526 LCD1.3
NetLCD1_4: LCD1.4 U4.3 | length 5.7
  Top Layer w0.254: LCD1.4 60.452,13.208 61.468,13.208 62.241,13.981 U4.3@62.241,15.742
NetLCD1_6: LCD1.6 U4.4 | length 4.4
  Top Layer w0.254: U4.4@62.891,15.742 62.891,13.309 LCD1.6
NetLCD1_11: LCD1.11 U4.5 | length 15.9
  Top Layer w0.254: U4.5@63.541,15.996 63.541,14.691 65.024,13.208 75.692,13.208 LCD1.11
NetLCD1_12: LCD1.12 U4.6 | length 17.7
  Top Layer w0.254: U4.6@64.191,15.996 64.191,14.803 65.297,13.697 77.743,13.697 LCD1.12
NetLCD1_13: LCD1.13 U4.7 | length 19.5
  Top Layer w0.254: U4.7@64.841,15.996 64.841,14.915 65.601,14.155 79.825,14.155 LCD1.13
NetLCD1_14: LCD1.14 U4.8 | length 21.3
  Top Layer w0.254: U4.8@65.491,15.996 65.491,15.027 65.906,14.612 81.908,14.612 LCD1.14
NetLCD1_15: LCD1.15 R18.2 | length 33.9
  Top Layer w0.254: R18.2 57.912,12.942 57.912,11.303 58.547,10.668 85.979,10.668 87.122,11.811 LCD1.15
NetQ1_1: Q2.1 R17.2 R50.1 | length 80.2
  Top Layer w0.254: R17.2 65.278,27.686 v1(76.962,16.002) ; v1(120.396,11.43) 120.408,11.442 R50.1 122.216,11.4 Q2.1
  Bottom Layer w0.254: v1(76.962,16.002) 78.232,14.732 78.232,11.176 78.74,10.668 119.634,10.668 v1(120.396,11.43)
NetQ2_B: Q1.1 R20.1 R21.1 R23.1 | length 9.3
  Top Layer w0.254: R21.1 R20.1 72.172,31.242 Q1.1 74.18,33.19 R23.1
NetR54_2: R20.2 U5.4 | length 1.8
  Top Layer w0.254: U5.4 68.526,31.308 R20.2
SCL: R4.1 R9.1 TP5.1 U3.1 | length 12.3
  Top Layer w0.254: R4.1@30.468,38.354 30.722,38.608 33.77,38.608 R9.1 TP5.1 37.846,36.576 37.846,35.56 38.602,34.804 U3.1
SDA: R8.1 TP4.1 U3.2 | length 6.6
  Top Layer w0.254: R8.1 TP4.1 38.132,34.004 U3.2
SHIELD: C24.2 J2.SH R53.2 | length 14.4
  Bottom Layer w0.254: R53.2 14.236,34.423 15.373,34.423 16.833,35.883 J2.SH@24.816,35.883
  Bottom Layer w0.508: J2.SH@12.776,35.883 14.236,34.423
SLEEVE1: J20.1 J20.2 J20.4 J20.5 R52.2 RL1.13
SLEEVE2: J18.1 J18.2 J18.4 J18.5 R52.1 RL1.9
SW1: C17.2 R30.2 R32.2 U3.24 | length 55.2
  Top Layer w0.254: U3.24 57.906,34.804 59.944,32.766 59.944,31.496 58.928,30.48 v1(57.15,30.48) ; v1(84.836,15.24) 85.852,15.24 C17.2 R30.2 R32.2
  Bottom Layer w0.254: v1(57.15,30.48) 57.912,29.718 68.58,29.718 83.058,15.24 v1(84.836,15.24)
SW2: C18.2 R31.2 R33.2 U3.23 | length 46.7
  Top Layer w0.254: U3.23 55.15,34.004 55.626,33.528 v1(57.15,33.528) ; v1(84.836,21.082) 85.852,21.082 85.84,21.07 86.336,20.574 C18.2 R31.2 R33.2
  Bottom Layer w0.254: v1(57.15,33.528) 58.674,33.528 60.96,31.242 69.342,31.242 72.168,28.416 72.168,28.4 80.247,20.32 84.074,20.32 v1(84.836,21.082)
SW3: C21.2 R40.2 R44.2 U3.22 | length 59.1
  Top Layer w0.254: U3.22 54.426,33.204 v1(55.626,32.004) ; v1(95.504,15.24) 96.508,15.24 C21.2 R40.2 R44.2 R44.2@100.318,15.76
  Bottom Layer w0.254: v1(55.626,32.004) 57.15,32.004 58.928,30.226 68.834,30.226 82.804,16.256 94.488,16.256 v1(95.504,15.24)
SW4: C22.2 R41.2 R45.2 U3.21 | length 58.2
  Top Layer w0.254: U3.21 53.194,32.404 54.864,30.734 55.88,30.734 57.15,32.004 v1(58.674,32.004) ; v1(95.504,21.082) 96.508,21.082 C22.2 97.04,20.55 R41.2 98.564,20.562 R45.2
  Bottom Layer w0.254: v1(58.674,32.004) 59.944,30.734 69.088,30.734 80.01,19.812 94.234,19.812 v1(95.504,21.082)
SW5: C20.2 R37.1 R39.2 U3.20 | length 52.6
  Top Layer w0.254: U3.20 53.232,31.604 55.626,29.21 72.39,29.21 72.644,28.956 v1(73.406,28.956) ; v1(79.502,30.988) 87.884,30.988 92.444,35.548 C20.2 R37.1 95.528,35.548 R39.2
  Bottom Layer w0.254: v1(73.406,28.956) 74.168,28.956 76.2,30.988 v1(79.502,30.988)
SW6: C19.1 R36.1 R38.2 U3.19 | length 52.1
  Top Layer w0.254: U3.19 53.27,30.804 55.372,28.702 72.136,28.702 74.168,26.67 v1(76.2,26.67) ; v1(92.456,30.734) 92.468,30.746 C19.1 R36.1 97.004,32.246 R38.2
  Bottom Layer w0.254: v1(76.2,26.67) 78.74,29.21 90.932,29.21 v1(92.456,30.734)
TIP1: J20.3 J20.6 RL1.4 | length 18.3
  Bottom Layer w0.762: RL1.4 137.414,22.352 J20.3 J20.6
TIP2: J18.3 J18.6 RL1.8 | length 39.9
  Bottom Layer w0.762: J18.3 114.3,22.352 ; J18.6 114.3,22.352 ; RL1.8 130.048,34.29 122.682,34.29 120.396,32.004 117.348,32.004 114.3,28.956 114.3,22.352
USBD_N: R11.1 U3.5 | length 3.6
  Top Layer w0.203: R11.1@37.199,30.988 R11.1 38.354,30.988 38.97,31.604 U3.5
USBD_P: R12.1 U3.4 | length 3.6
  Top Layer w0.203: R12.1@37.199,33.02 R12.1 38.354,33.02 38.97,32.404 U3.4
USBUP1_N: J2.2 U2.6 | length 9.7
  Top Layer w0.254: J2.2 20.165,31.054 U2.6
USBUP1_P: J2.3 U2.4 | length 9.7
  Top Layer w0.254: J2.3 20.265,32.954 U2.4
USBUP2_N: R11.2 U2.1 | length 3.6
  Top Layer w0.203: U2.1 32.354,30.988 R11.2
USBUP2_P: R12.2 U2.3 | length 3.4
  Top Layer w0.203: U2.3 35.633,32.954 R12.2@35.699,33.02
VBUS: C4.1 F1.1 J2.1 U2.5 | length 11.9
  Top Layer w0.203: U2.5@29.664,31.98 U2.5
  Top Layer w0.254: C4.1@27.432,31.98 U2.5@29.664,31.98
  Top Layer w0.762: F1.1@11.43,26.365 F1.1 11.684,29.21 13.647,31.173 J2.1
VBUSDET: R6.1 U3.8 | length 13.6
  Top Layer w0.254: R6.1 32.258,26.67 v1(33.274,27.686) ; v1(38.862,27.686) 39.878,27.686 40.504,28.312 U3.8
  Bottom Layer w0.254: v1(33.274,27.686) v1(38.862,27.686)
pads on no net: J11.1 J11.3 J12.1 J12.2 J12.3 J14.2 J18. J20. LCD1.7 LCD1.8 LCD1.9 LCD1.10 RL1.6 RL1.11 U4.9 U4.10 U5.1 U6.3

## Polygon pours and split planes (outlines as drawn)
GND on Bottom Layer "Top Layer-No Net" (solid, remove dead copper, pour order 9): 0,29 9,29 9,40 153,40 153,29 162,29 162,21 153,21 153,10 9,10 9,21 0,21
SLEEVE1 on Bottom Layer "GND" (solid, remove dead copper, pour order 6): 134.874,31.496 134.112,30.734 123.444,30.734 123.444,20.574 151.13,20.574 151.13,38.354 134.874,38.354
SLEEVE2 on Bottom Layer "GND" (solid, remove dead copper, pour order 5): 123.19,32.512 123.952,33.274 134.62,33.274 134.62,38.354 106.68,38.354 106.68,20.574 123.19,20.574
VBUS on Top Layer "GND" (solid, remove dead copper, pour order 7): 15.24,34.544 30.734,34.544 30.734,29.718 15.24,29.718
GND on Top Layer "Top Layer GND" (solid, remove dead copper, pour order 11): 0,29 9,29 9,40 153,40 153,29 162,29 162,21 153,21 153,10 9,10 9,21 0,21

## Keep-outs
Top Layer:
  rectangle: 106.68,20.574 151.13,38.354

## Other copper
Top Layer:
  rectangle net GND: 41.656,28.956 47.752,35.052

## Silkscreen, mask and mechanical layers (free items; w line width, h text height)
Top Overlay:
  lines w0.203: 38.354,33.782 38.354,26.162 45.974,26.162 45.974,21.082 ; 74.422,30.48 76.708,30.48 ; 75.184,30.48 75.184,34.798 ; 94.742,30.099 94.742,29.21 94.996,28.956 95.25,28.956 95.504,28.956 ; 97.79,26.924 102.616,26.924 ; 99.314,34.81 99.314,33.413 99.822,32.905 99.822,30.734 101.092,29.464 101.092,28.702 101.092,26.924
  text "FUTSW" at 55.372,29.972 h1.52
  text "Rev.A" at 55.372,27.686 h1.52
  text "2021" at 55.372,25.4 h1.52
  text "V" at 33.782,19.05 h1.52
  text "С2D" at 35.306,19.05 h1.52
  text "G" at 38.608,19.05 h1.52
  text "C2CK" at 40.132,19.05 h1.52
Mechanical 1:
  the board outline again, w0.254

## Text inside footprints (layer, text, board x,y; h text height)
F1: Top Overlay "F" at 10.922,25.375 h1.52 r270